# Altium PCB bdcmc-24-2-motors.PcbDoc
Units mil, origin at the board's own origin, x right, y up, seen from the top; angles counter-clockwise.
Board outline 6000 x 4000 mil, 2 copper layers (Top Layer, Bottom Layer); 195 components, 101 nets, 659 pads, 24 vias.
Unrouted connection lines stored in the file: 468.
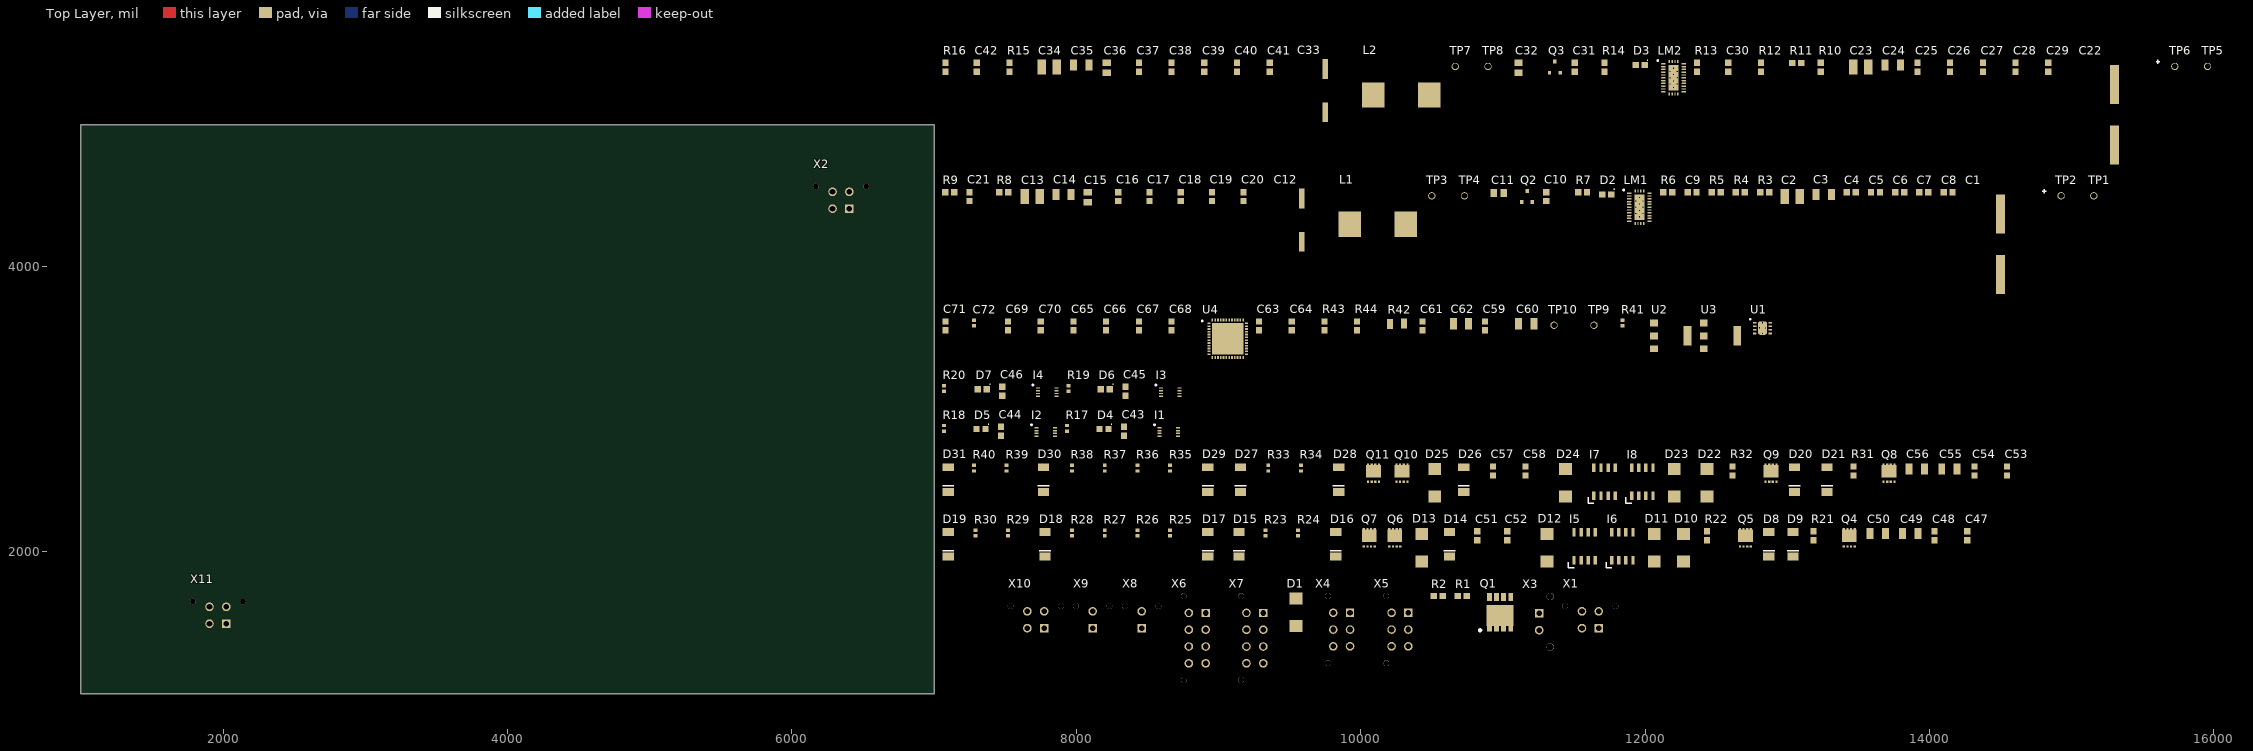
[diagram p0: Top Layer view]
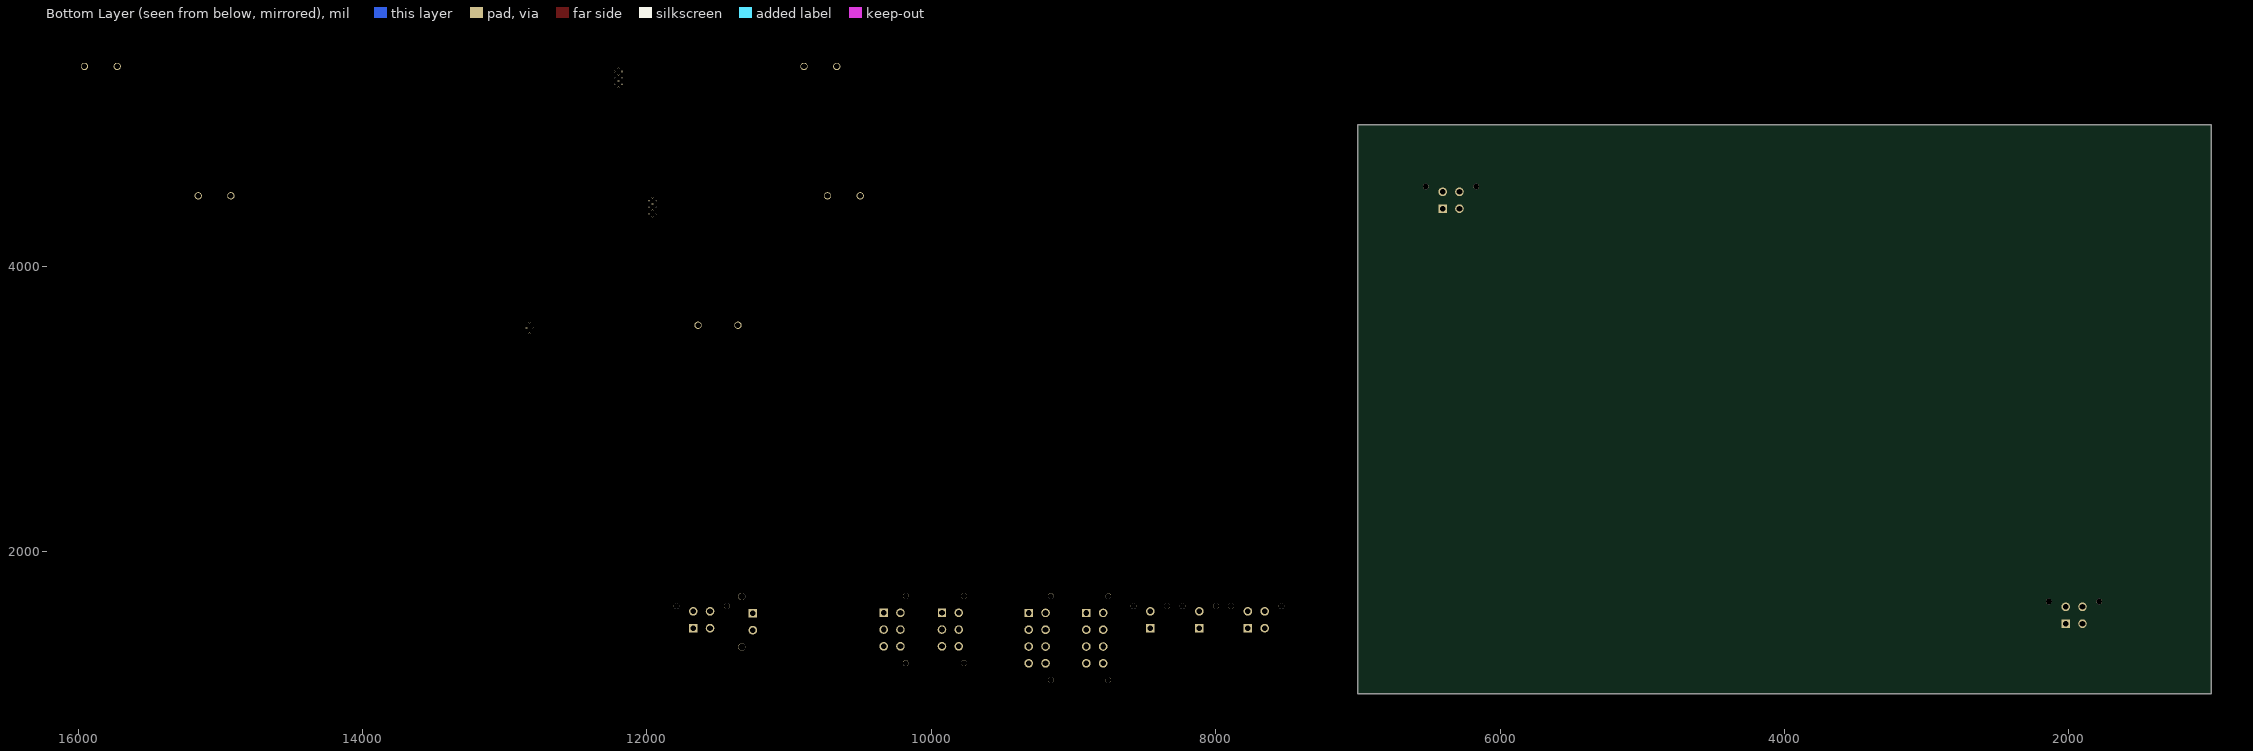
[diagram p1: Bottom Layer view, seen from below]

## Layer stack, top to bottom
Top Solder: solder mask 0.4, Solder Resist, Dk 3.5
Top Layer: signal copper 1.4
Dielectric 1: dielectric 12.6, FR-4, Dk 4.8
Bottom Layer: signal copper 1.4
Bottom Solder: solder mask 0.4, Solder Resist, Dk 3.5

## Board outline
1000,1000 7000,1000 7000,5000 1000,5000

## Design rules (kind name [scope] priority, off if disabled: settings)
Clearance [All] p1: gap=10 ignorepadtopadclearanceinfootprint=FALSE except(0: Arc-Hole Track-Hole SMDPad-Hole THPad-Hole Via-Hole Fill-Hole Poly-Hole Region-Hole Text-Hole)
DiffPairsRouting [All] p1: maxlimit=10 minlimit=10 mostfreqgap=10 toplayer_minwidth=15 toplayer_maxwidth=15 toplayer_prefwidth=15 bottomlayer_minwidth=15 bottomlayer_maxwidth=15 bottomlayer_prefwidth=15 maxuncoupledlength=500
PolygonConnect [All] p1: connectstyle=Relief reliefconductorwidth=10 reliefentries=4 polygonreliefangle="90 Angle" airgapwidth=10
RoomDefinition Motor_12V_Buck_1 [InComponentClass('Motor_12V_Buck_1')] p1: confinementstyle=ConfineIn formatcopy=TRUE lockcomponents=FALSE outline 7045,4710 16095,4710 16095,5570 7045,5570
RoomDefinition Motor_12V_Buck_0 [InComponentClass('Motor_12V_Buck_0')] p2: confinementstyle=ConfineIn formatcopy=TRUE lockcomponents=FALSE outline 7045,3800 15275,3800 15275,4660 7045,4660
RoomDefinition MCU_CAN [InComponentClass('MCU_CAN')] p3: confinementstyle=ConfineIn formatcopy=TRUE lockcomponents=FALSE outline 7045,3340 12900,3340 12900,3750 7045,3750
RoomDefinition HBridge_Top_Level_1 [InComponentClass('HBridge_Top_Level_1')] p4: confinementstyle=ConfineIn formatcopy=TRUE lockcomponents=FALSE outline 7045,3060 8750,3060 8750,3290 7045,3290
RoomDefinition HBridge_Top_Level_0 [InComponentClass('HBridge_Top_Level_0')] p5: confinementstyle=ConfineIn formatcopy=TRUE lockcomponents=FALSE outline 7045,2780 8740,2780 8740,3010 7045,3010
RoomDefinition HBridge_Design_1 [InComponentClass('HBridge_Design_1')] p6: confinementstyle=ConfineIn formatcopy=TRUE lockcomponents=FALSE outline 7045,2330 14705,2330 14705,2730 7045,2730
RoomDefinition HBridge_Design_0 [InComponentClass('HBridge_Design_0')] p7: confinementstyle=ConfineIn formatcopy=TRUE lockcomponents=FALSE outline 7045,1875 14425,1875 14425,2275 7045,2275
RoutingVias [All] p1: holewidth=28 width=50 viastyle="Through Hole" minholewidth=28 minwidth=50 maxholewidth=28 maxwidth=50
SolderMaskExpansion [All] p1: expansion=4 istentingtop=FALSE
Width [All] p1: maxlimit=10 minlimit=10 preferedwidth=10
29 further rules are at their usual default settings.

## Classes and differential pairs
component class Motor_12V_Buck_1: C22 C23 C24 C25 C26 C27 C28 C29 C30 C31 C32 C33 C34 C35 C36 C37 C38 C39 C40 C41 C42 D3 L2 LM2 Q3 R10 R11 R12 R13 R14 R15 R16 TP5 TP6 TP7 TP8
component class Motor_12V_Buck_0: C1 C2 C3 C4 C5 C6 C7 C8 C9 C10 C11 C12 C13 C14 C15 C16 C17 C18 C19 C20 C21 D2 L1 LM1 Q2 R3 R4 R5 R6 R7 R8 R9 TP1 TP2 TP3 TP4
component class MCU_CAN: C59 C60 C61 C62 C63 C64 C65 C66 C67 C68 C69 C70 C71 C72 P1 R41 R42 R43 R44 TP9 TP10 U1 U2 U3 U4
component class HBridge_Top_Level_1: C45 C46 D6 D7 I3 I4 R19 R20
component class HBridge_Top_Level_0: C43 C44 D4 D5 I1 I2 R17 R18
component class HBridge_Design_1: C53 C54 C55 C56 C57 C58 D20 D21 D22 D23 D24 D25 D26 D27 D28 D29 D30 D31 I7 I8 Q8 Q9 Q10 Q11 R31 R32 R33 R34 R35 R36 R37 R38 R39 R40
component class HBridge_Design_0: C47 C48 C49 C50 C51 C52 D8 D9 D10 D11 D12 D13 D14 D15 D16 D17 D18 D19 I5 I6 Q4 Q5 Q6 Q7 R21 R22 R23 R24 R25 R26 R27 R28 R29 R30
component class Connectors: D1 Q1 R1 R2 X1 X2 X3 X4 X5 X6 X7 X8 X9 X10 X11
differential pair CAN: +CAN_P -CAN_N

## Components (designator, comment, footprint, x,y, rotation, side; value= is the part's Value field where it differs from the comment)
C1 "100SEV100M12.5X16" ELEC-100U-0001 14500,4160 r0 top
C2 "C3225X7R1N106K250AC" CAP-1210 13035,4495 r0 top
C3 "CL31B105KCHNNNE" "CAP-1206 - duplicate" 13250,4510 r0 top
C4 "CC0603KRX7R0BB104" CAP-0603 13450,4525 r0 top
C5 "C1608C0G2A103J080AC" CAP-0603 13620,4525 r0 top
C6 "C0603Y102K1RAC7867" CAP-0603 13790,4525 r0 top
C7 "0603N101J101CT" CAP-0603 13960,4525 r0 top
C8 "0603N100J500CT" CAP-0603 14130,4525 r0 top
C9 "CC0603KRX7R9BB333" CAP-0603 12330,4525 r0 top
C10 "UMK107BBJ225KA-T" CAP-0603 11305,4495 r90 top
C11 "KAM21KR72A474KL" CAP-0805 10970,4520 r0 top
C12 "50TZV220M10X10.5" ELEC-220U-0003 9585,4330 r0 top
C13 "C3225X7R1N106K250AC" CAP-1210 7690,4495 r0 top
C14 "CL31B105KCHNNNE" "CAP-1206 - duplicate" 7905,4510 r0 top
C15 "KAM21KR72A474KL" CAP-0805 8080,4490 r90 top
C16 "CC0603KRX7R0BB104" CAP-0603 8295,4495 r90 top
C17 "C1608C0G2A103J080AC" CAP-0603 8515,4495 r90 top
C18 "C0603Y102K1RAC7867" CAP-0603 8735,4495 r90 top
C19 "0603N101J101CT" CAP-0603 8955,4495 r90 top
C20 "0603N100J500CT" CAP-0603 9175,4495 r90 top
C21 "885012006087" CAP-0603 7250,4495 r90 top
C22 "100SEV100M12.5X16" ELEC-100U-0001 15300,5070 r0 top
C23 "C3225X7R1N106K250AC" CAP-1210 13515,5405 r0 top
C24 "CL31B105KCHNNNE" "CAP-1206 - duplicate" 13735,5420 r0 top
C25 "CC0603KRX7R0BB104" CAP-0603 13915,5405 r90 top
C26 "C1608C0G2A103J080AC" CAP-0603 14145,5405 r90 top
C27 "C0603Y102K1RAC7867" CAP-0603 14375,5405 r90 top
C28 "0603N101J101CT" CAP-0603 14605,5405 r90 top
C29 "0603N100J500CT" CAP-0603 14835,5405 r90 top
C30 "CC0603KRX7R9BB333" CAP-0603 12585,5405 r90 top
C31 "UMK107BBJ225KA-T" CAP-0603 11505,5405 r90 top
C32 "KAM21KR72A474KL" CAP-0805 11110,5400 r90 top
C33 "50TZV220M10X10.5" ELEC-220U-0003 9750,5240 r0 top
C34 "C3225X7R1N106K250AC" CAP-1210 7810,5405 r0 top
C35 "CL31B105KCHNNNE" "CAP-1206 - duplicate" 8030,5420 r0 top
C36 "KAM21KR72A474KL" CAP-0805 8215,5400 r90 top
C37 "CC0603KRX7R0BB104" CAP-0603 8440,5405 r90 top
C38 "C1608C0G2A103J080AC" CAP-0603 8670,5405 r90 top
C39 "C0603Y102K1RAC7867" CAP-0603 8900,5405 r90 top
C40 "0603N101J101CT" CAP-0603 9130,5405 r90 top
C41 "0603N100J500CT" CAP-0603 9360,5405 r90 top
C42 "885012006087" CAP-0603 7300,5405 r90 top
C43 "CC0603KRX7R0BB104" CAP-0603 8335,2845 r90 top
C44 "CC0603KRX7R0BB104" CAP-0603 7470,2845 r90 top
C45 "CC0603KRX7R0BB104" CAP-0603 8345,3125 r90 top
C46 "CC0603KRX7R0BB104" CAP-0603 7480,3125 r90 top
C47 "C1608C0G2A103J080AC" CAP-0603 14265,2110 r90 top
C48 "C1608C0G2A103J080AC" CAP-0603 14035,2110 r90 top
C49 "CAP-1U-0001" "CAP-1206 - duplicate" 13860,2125 r0 top
C50 "CAP-1U-0001" "CAP-1206 - duplicate" 13630,2125 r0 top
C51 "CC0603KRX7R0BB104" CAP-0603 10820,2110 r90 top
C52 "CC0603KRX7R0BB104" CAP-0603 11030,2110 r90 top
C53 "C1608C0G2A103J080AC" CAP-0603 14545,2565 r90 top
C54 "C1608C0G2A103J080AC" CAP-0603 14315,2565 r90 top
C55 "CAP-1U-0001" "CAP-1206 - duplicate" 14135,2580 r0 top
C56 "CAP-1U-0001" "CAP-1206 - duplicate" 13905,2580 r0 top
C57 "CC0603KRX7R0BB104" CAP-0603 10930,2565 r90 top
C58 "CC0603KRX7R0BB104" CAP-0603 11160,2565 r90 top
C59 "CGA3E3X7R1H334K080AB" CAP-0603 10875,3585 r90 top
C60 "CL31B106KBHNNNE" CAP-1206 11165,3600 r0 top
C61 "CGA3E3X7R1H334K080AB" CAP-0603 10435,3585 r90 top
C62 "CL31B106KBHNNNE" CAP-1206 10705,3600 r0 top
C63 "TMK107BBJ475KA-T" CAP-0603 9285,3585 r90 top
C64 "CC0603KRX7R0BB104" CAP-0603 9515,3585 r90 top
C65 "TMK107BBJ475KA-T" CAP-0603 7980,3585 r90 top
C66 "CC0603KRX7R0BB104" CAP-0603 8210,3585 r90 top
C67 "CC0603KRX7R0BB104" CAP-0603 8440,3585 r90 top
C68 "CC0603KRX7R0BB104" CAP-0603 8670,3585 r90 top
C69 "UMK107AB7105KA-T" CAP-0603 7520,3585 r90 top
C70 "CC0603KRX7R0BB104" CAP-0603 7750,3585 r90 top
C71 "UMK107AB7105KA-T" CAP-0603 7080,3585 r90 top
C72 "CC0402KRX7R0BB103" CAP-0402 7280,3605 r90 top
D1 "SMBJE43CAH" "DO-214AA (SMBJ)" 9545,1570 r90 top
D2 "150060AS75000" LED-0603 11730,4510 r0 top
D3 "150060AS75000" LED-0603 11965,5420 r0 top
D4 "150060AS75000" LED-0603 8195,2860 r0 top
D5 "150060AS75000" LED-0603 7330,2860 r0 top
D6 "150060AS75000" LED-0603 8205,3140 r0 top
D7 "150060AS75000" LED-0603 7340,3140 r0 top
D8 "PMEG6030EP,115" DIO-SOD128 12870,2050 r0 top
D9 "PMEG6030EP,115" DIO-SOD128 13040,2050 r0 top
D10 "SMBJ12CA" "DO-214AA (SMBJ)" 12270,2025 r90 top
D11 "SMBJ12CA" "DO-214AA (SMBJ)" 12065,2025 r90 top
D12 "SMBJ12CA" "DO-214AA (SMBJ)" 11310,2025 r90 top
D13 "SMBJ12CA" "DO-214AA (SMBJ)" 10430,2025 r90 top
D14 "PMEG6030EP,115" DIO-SOD128 10625,2050 r0 top
D15 "PMEG6030EP,115" DIO-SOD128 9145,2050 r0 top
D16 "PMEG6030EP,115" DIO-SOD128 9825,2050 r0 top
D17 "PMEG6030EP,115" DIO-SOD128 8925,2050 r0 top
D18 "PMEG6030EP,115" DIO-SOD128 7780,2050 r0 top
D19 "PMEG6030EP,115" DIO-SOD128 7100,2050 r0 top
D20 "PMEG6030EP,115" DIO-SOD128 13050,2505 r0 top
D21 "PMEG6030EP,115" DIO-SOD128 13280,2505 r0 top
D22 "SMBJ12CA" "DO-214AA (SMBJ)" 12435,2480 r90 top
D23 "SMBJ12CA" "DO-214AA (SMBJ)" 12205,2480 r90 top
D24 "SMBJ12CA" "DO-214AA (SMBJ)" 11440,2480 r90 top
D25 "SMBJ12CA" "DO-214AA (SMBJ)" 10520,2480 r90 top
D26 "PMEG6030EP,115" DIO-SOD128 10725,2505 r0 top
D27 "PMEG6030EP,115" DIO-SOD128 9155,2505 r0 top
D28 "PMEG6030EP,115" DIO-SOD128 9845,2505 r0 top
D29 "PMEG6030EP,115" DIO-SOD128 8925,2505 r0 top
D30 "PMEG6030EP,115" DIO-SOD128 7770,2505 r0 top
D31 "PMEG6030EP,115" DIO-SOD128 7100,2505 r0 top
I1 "SN74LVC2G157DCUR" IC-MUX-8VSSOP 8585,2810 r0 top
I2 "SN74LVC2G157DCUR" IC-MUX-8VSSOP 7720,2810 r0 top
I3 "SN74LVC2G157DCUR" IC-MUX-8VSSOP 8595,3090 r0 top
I4 "SN74LVC2G157DCUR" IC-MUX-8VSSOP 7730,3090 r0 top
I5 "UCC27284QDQ1" IC-BUCK-8SOIC 11575,2035 r0 top
I6 "UCC27284QDQ1" IC-BUCK-8SOIC 11840,2035 r0 top
I7 "UCC27284QDQ1" IC-BUCK-8SOIC 11715,2490 r0 top
I8 "UCC27284QDQ1" IC-BUCK-8SOIC 11980,2490 r0 top
L1 "SRP1270-100M" PWRIND-10U-0002 10120,4300 r0 top
L2 "SRP1270-100M" PWRIND-10U-0002 10285,5210 r0 top
LM1 "LM76005RNPR" IC-30-WQFN(6x4) 11960,4420 r0 top
LM2 "LM76005RNPR" IC-30-WQFN(6x4) 12200,5330 r0 top
Q1 "TPH7R006PL,L1Q" NMOS-8PowerVDFN 10905,1460 r0 top
Q2 "T2N7002AK,LM" NMOS-SOT23-3 11170,4495 r0 top
Q3 "T2N7002AK,LM" NMOS-SOT23-3 11365,5405 r0 top
Q4 "TPN11006PL,LQ" NMOS-8TSON 13435,2095 r0 top
Q5 "TPN11006PL,LQ" NMOS-8TSON 12705,2095 r0 top
Q6 "TPN11006PL,LQ" NMOS-8TSON 10240,2095 r0 top
Q7 "TPN11006PL,LQ" NMOS-8TSON 10060,2095 r0 top
Q8 "TPN11006PL,LQ" NMOS-8TSON 13715,2550 r0 top
Q9 "TPN11006PL,LQ" NMOS-8TSON 12885,2550 r0 top
Q10 "TPN11006PL,LQ" NMOS-8TSON 10290,2550 r0 top
Q11 "TPN11006PL,LQ" NMOS-8TSON 10090,2550 r0 top
R1 "ERJ-3EKF2003V" RES-0603 10715,1685 r0 top
R2 "RC0603FR-07100KL" RES-0603 10545,1685 r0 top
R3 "RC0603FR-072M15L" RES-0603 12840,4525 r0 top
R4 "RC0603FR-07100KL" RES-0603 12670,4525 r0 top
R5 "RC0603FR-0776K8L" RES-0603 12500,4525 r0 top
R6 "AC0603FR-10100RL" RES-0603 12160,4525 r0 top
R7 "RC0603FR-0710KP" RES-0603 11560,4525 r0 top
R8 "RC0603FR-07100KL" RES-0603 7490,4525 r0 top
R9 "RC0603FR-079K09L" RES-0603 7110,4525 r0 top
R10 "RC0603FR-072M15L" RES-0603 13235,5405 r90 top
R11 "RC0603FR-07100KL" RES-0603 13065,5435 r0 top
R12 "RC0603FR-0776K8L" RES-0603 12815,5405 r90 top
R13 "AC0603FR-10100RL" RES-0603 12365,5405 r90 top
R14 "RC0603FR-0710KP" RES-0603 11715,5405 r90 top
R15 "RC0603FR-07100KL" RES-0603 7530,5405 r90 top
R16 "RC0603FR-079K09L" RES-0603 7080,5405 r90 top
R17 "RC0402JR-07100RP" RES-0402 7935,2865 r90 top
R18 "RC0402JR-07100RP" RES-0402 7070,2865 r90 top
R19 "RC0402JR-07100RP" RES-0402 7945,3145 r90 top
R20 "RC0402JR-07100RP" RES-0402 7070,3145 r90 top
R21 "RNCP0603FTD1R00" RES-0603 13185,2110 r90 top
R22 "RNCP0603FTD1R00" RES-0603 12435,2110 r90 top
R23 "RC0402JR-0733RP" RES-0402 9330,2130 r90 top
R24 "RC0402JR-0733RP" RES-0402 9560,2130 r90 top
R25 "RC0402JR-0733RP" RES-0402 8660,2130 r90 top
R26 "RC0402JR-0733RP" RES-0402 8430,2130 r90 top
R27 "RC0402JR-0733RP" RES-0402 8200,2130 r90 top
R28 "RC0402JR-0733RP" RES-0402 7970,2130 r90 top
R29 "RC0402JR-0733RP" RES-0402 7520,2130 r90 top
R30 "RC0402JR-0733RP" RES-0402 7290,2130 r90 top
R31 "RNCP0603FTD1R00" RES-0603 13465,2565 r90 top
R32 "RNCP0603FTD1R00" RES-0603 12615,2565 r90 top
R33 "RC0402JR-0733RP" RES-0402 9350,2585 r90 top
R34 "RC0402JR-0733RP" RES-0402 9580,2585 r90 top
R35 "RC0402JR-0733RP" RES-0402 8660,2585 r90 top
R36 "RC0402JR-0733RP" RES-0402 8430,2585 r90 top
R37 "RC0402JR-0733RP" RES-0402 8200,2585 r90 top
R38 "RC0402JR-0733RP" RES-0402 7970,2585 r90 top
R39 "RC0402JR-0733RP" RES-0402 7510,2585 r90 top
R40 "RC0402JR-0733RP" RES-0402 7280,2585 r90 top
R41 "RC0402FR-074K7P" RES-0402 11840,3605 r90 top
R42 "CRGH1206F120R" RES-1206 10255,3600 r0 top
R43 "AF0603FR-074K7L" RES-0603 9745,3585 r90 top
R44 "AF0603FR-074K7L" RES-0603 9975,3585 r90 top
TP1 "5003" TEST-POINT-0001 15155,4500 r0 top
TP2 "5003" TEST-POINT-0001 14925,4500 r0 top
TP3 "5003" TEST-POINT-0001 10500,4500 r0 top
TP4 "5003" TEST-POINT-0001 10730,4500 r0 top
TP5 "5003" TEST-POINT-0001 15955,5410 r0 top
TP6 "5003" TEST-POINT-0001 15725,5410 r0 top
TP7 "5003" TEST-POINT-0001 10665,5410 r0 top
TP8 "5003" TEST-POINT-0001 10895,5410 r0 top
TP9 "5003" TEST-POINT-0001 11640,3590 r0 top
TP10 "5003" TEST-POINT-0001 11360,3590 r90 top
U1 "TCAN1042HGDRBTQ1" IC-8-VSON 12825,3570 r0 top
U2 "UA78M33CDCYR" IC-SOT-223-4 12180,3515 r0 top
U3 "UA78M05IDCYR" IC-SOT-223-4 12530,3515 r0 top
U4 "STM32G431CBU6" MCU-UFQFPN48 9065,3495 r0 top
X1 "Molex 43045-0412" 43045-0412 11615,1460 r0 top
X2 "Molex 43045-0412" 43045-0412 6345,4410 r0 top
X3 "Molex 43650-0215" 43650-0215 11255,1505 r90 top
X4 "Molex 43045-0612" 43045-0612 9925,1450 r90 top
X5 "Molex 43045-0612" 43045-0612 10335,1450 r90 top
X6 "Molex 43045-0812" 43045-0812 8910,1390 r90 top
X7 "Molex 43045-0812" 43045-0812 9315,1390 r90 top
X8 "Molex - Micro-Fit 3.0 Series connector,  3.00mm (0.118\") pitch header, 2 positions." 43045-0212 8460,1460 r0 top
X9 "Molex - Micro-Fit 3.0 Series connector,  3.00mm (0.118\") pitch header, 2 positions." 43045-0212 8115,1460 r0 top
X10 "Molex 43045-0412" 43045-0412 7715,1460 r0 top
X11 "Molex 43045-0412" 43045-0412 1964.06,1491.89 r0 top

## Footprints (in the part's own frame and the unit in brackets; to place one, negate y for a bottom-side part, rotate by r counter-clockwise, add the part's x,y. Pads: shape width x height; smd on the part's side, far side on the other; paste and mask are expansions set on the pad)
43045-0212 [mm]
  round 1.02 hole 1.02 unplated: 1(-3,3.94) 1(3,3.94)
  rect 1.482x1.482 / inner rect 1.524x1.524 / far side rect 1.482x1.482 hole 1.02: P$1(0,0)
  round 1.53 / inner round 1.524 / far side round 1.53 hole 1.02: P$2(0,3)
43045-0412 [mm]
  round 1.02 hole 1.02 unplated: 1(-4.5,3.94) 1(4.5,3.94)
  rect 1.482x1.482 / inner rect 1.524x1.524 / far side rect 1.482x1.482 hole 1.02: P$1(1.5,0)
  round 1.53 / inner round 1.524 / far side round 1.53 hole 1.02: P$2(-1.5,0) P$3(1.5,3) P$4(-1.5,3)
  body extent -5.07,-2.45 5.08,6.32, height 10.03
43045-0612 [mm]
  round 1.02 hole 1.02 unplated: 1(-6,3.94) 1(6,3.94)
  rect 1.482x1.482 / inner rect 1.524x1.524 / far side rect 1.482x1.482 hole 1.02: P$1(3,0)
  round 1.53 / inner round 1.524 / far side round 1.53 hole 1.02: P$2(0,0) P$3(-3,0) P$4(3,3) P$5(0,3) P$6(-3,3)
  body extent -6.57,-2.45 6.58,6.32, height 10.03
43045-0812 [mm]
  round 1.02 hole 1.02 unplated: 1(-7.5,3.94) 1(7.5,3.94)
  rect 1.482x1.482 / inner rect 1.524x1.524 / far side rect 1.482x1.482 hole 1.02: P$1(4.5,0)
  round 1.53 / inner round 1.524 / far side round 1.53 hole 1.02: P$2(1.5,0) P$3(-1.5,0) P$4(-4.5,0) P$5(4.5,3) P$6(1.5,3) P$7(-1.5,3) P$8(-4.5,3)
  body extent -8.07,-2.45 8.08,6.32, height 10.03
43650-0215 [mil]
  round 50 hole 50 unplated: 1(-177.17,-77.17) 1(177.17,-77.17)
  rect 58.33x58.33 / inner rect 60x60 / far side rect 58.33x58.33 hole 40.16: P$1(59.06,0)
  round 60.24 / inner round 60 / far side round 60.24 hole 40.16: P$2(-59.06,0)
  body extent -190,-97 190,123, height 395
CAP-0402 [mm]
  rect 0.6x0.7 smd: 1(-0.5,0) 2(0.5,0)
  body extent -0.5,-0.22 0.5,0.23, height 0.5
CAP-0603 [mm]
  rect 1.15x1.1 smd: 1(-0.8,0) 2(0.8,0)
  body extent -0.8,-0.45 0.8,0.45, height 0.8
CAP-0805 [mm]
  rect 1.16x1.47 smd: 1(-0.88,0) 2(0.88,0)
  body extent -1,-0.63 1,0.63, height 0.94
CAP-1206 [mm]
  rect 1.25x2 smd: 1(-1.375,0) 2(1.375,0)
  body extent -1.6,-0.8 1.6,0.8, height 1.5
"CAP-1206 - duplicate" [mm]
  rect 1.25x2 smd: 1(-1.248,0) 2(1.502,0)
  body extent -1.47,-0.8 1.73,0.8, height 1.5
CAP-1210 [mm]
  rect 1.53x2.72 smd: 1(-1.341,0) 2(1.341,0)
  body extent -1.6,-1.25 1.6,1.25, height 2.7
DIO-SOD128 [mm]
  rect 2x1.4 smd: 1(0,2.2) 2(0,-2.2)
  silkscreen extent -1.02,-1.14 1.02,-1.14, body extent -1.25,-2.35 1.25,2.35, height 1.05
"DO-214AA (SMBJ)" [mm]
  rect 2.16x2.26 smd: 1(-2.416,0) 2(2.484,0)
  body extent -2.72,-1.95 2.78,1.95, height 2.45
ELEC-100U-0001 [mm]
  rect 1.6x7 smd: 1(0,5.4) 2(0,-5.4)
  silkscreen extent 7.45,9.08 8.13,9.82, body extent -6.6,-7.15 6.6,7.15, height 16.56
ELEC-220U-0003 [mm]
  rect 1x3.5 smd: 1(0,-3.85) 2(0,3.85)
  body extent -5.25,-5.45 5.25,5.45, height 10.54
IC-8-VSON [mm]
  rrect50% 0.6x0.3 smd mask+0.07: 1(-1.4,0.975) 2(-1.4,0.325) 3(-1.4,-0.325) 4(-1.4,-0.975) 5(1.4,-0.975) 6(1.4,-0.325) 7(1.4,0.325) 8(1.4,0.975)
  rrect50% 1.6x2.4 smd: 9(0,0)
  silkscreen extent -2.26,1.48 -2.08,1.67, body extent -1.5,-1.5 1.5,1.5, height 1
IC-30-WQFN(6x4) [mm] "30 pin WQFN with exposed pad"
  rrect50% 0.75x0.25 smd mask+0.07: 1(-1.825,2.5) 2(-1.825,2) 3(-1.825,1.5) 4(-1.825,1) 5(-1.825,0.5) 6(-1.825,0) 7(-1.825,-0.5) 8(-1.825,-1) 9(-1.825,-1.5) 10(-1.825,-2) 11(-1.825,-2.5) 16(1.825,-2.5) 17(1.825,-2) 18(1.825,-1.5) 19(1.825,-1) 20(1.825,-0.5) 21(1.825,0) 22(1.825,0.5) 23(1.825,1) 24(1.825,1.5) 25(1.825,2) 26(1.825,2.5)
  rrect50% 0.25x0.6 smd mask+0.07: 12(-0.75,-2.9) 13(-0.25,-2.9) 14(0.25,-2.9) 15(0.75,-2.9) 27(0.75,2.9) 28(0.25,2.9) 29(-0.25,2.9) 30(-0.75,2.9)
  rect 1.8x4.5 smd: 31(0,0)
  silkscreen extent -2.94,2.96 -2.71,3.19, body extent -2,-3 2,3, height 0.8
IC-BUCK-8SOIC [mm]
  rect 0.6x1.5 smd: 1(-1.905,-2.5) 2(-0.635,-2.5) 3(0.635,-2.5) 4(1.905,-2.5) 5(1.905,2.5) 6(0.635,2.5) 7(-0.635,2.5) 8(-1.905,2.5)
  silkscreen extent -2.92,-3.81 -1.91,-2.79, body extent -2.45,-3 2.45,3, height 1.75
IC-MUX-8VSSOP [mm]
  rect 0.75x0.25 smd: 1(0,1.5) 2(0,1) 3(0,0.5) 4(0,0) 5(3.3,0) 6(3.3,0.5) 7(3.3,1) 8(3.3,1.5)
  silkscreen extent -1.02,1.91 -0.76,2.16, body extent 0.1,-0.24 3.2,1.76, height 0.9
IC-SOT-223-4 [mm]
  rect 1.4x1.2 smd mask+0.07: 1(-3,2.3) 2(-3,0) 3(-3,-2.3)
  rect 1.4x3.5 smd: 2(3,0)
  body extent -3.5,-3.25 3.5,3.25, height 1.68
LED-0603 [mm]
  rect 1.15x1.1 smd: 1(-0.8,0) 2(0.8,0)
  silkscreen extent 1.27,0.89 1.4,0.89, body extent -0.8,-0.3 0.8,0.3, height 1
MCU-UFQFPN48 [mm] "STM32G431CBU6"
  rect 0.55x0.3 smd mask+0.07: 1(-3.375,2.75) 2(-3.375,2.25) 3(-3.375,1.75) 4(-3.375,1.25) 5(-3.375,0.75) 6(-3.375,0.25) 7(-3.375,-0.25) 8(-3.375,-0.75) 9(-3.375,-1.25) 10(-3.375,-1.75) 11(-3.375,-2.25) 12(-3.375,-2.75) 25(3.375,-2.75) 26(3.375,-2.25) 27(3.375,-1.75) 28(3.375,-1.25) 29(3.375,-0.75) 30(3.375,-0.25) 31(3.375,0.25) 32(3.375,0.75) 33(3.375,1.25) 34(3.375,1.75) 35(3.375,2.25) 36(3.375,2.75)
  rect 0.3x0.55 smd mask+0.07: 13(-2.75,-3.375) 14(-2.25,-3.375) 15(-1.75,-3.375) 16(-1.25,-3.375) 17(-0.75,-3.375) 18(-0.25,-3.375) 19(0.25,-3.375) 20(0.75,-3.375) 21(1.25,-3.375) 22(1.75,-3.375) 23(2.25,-3.375) 24(2.75,-3.375) 37(2.75,3.375) 38(2.25,3.375) 39(1.75,3.375) 40(1.25,3.375) 41(0.75,3.375) 42(0.25,3.375) 43(-0.25,3.375) 44(-0.75,3.375) 45(-1.25,3.375) 46(-1.75,3.375) 47(-2.25,3.375) 48(-2.75,3.375)
  rect 5.6x5.6 smd: 49(0,0)
  silkscreen extent -4.67,3.08 -4.43,3.32, body extent -3.56,-3.56 3.56,3.56, height 0.61
NMOS-8PowerVDFN [mm]
  rect 0.85x1.45 smd: 1(0,5.588) 2(1.27,5.588) 2(2.54,5.588) 2(3.81,5.588)
  rect 0.85x1.05 smd: 3(0,-0.112) 3(1.27,-0.112) 3(2.54,-0.112) 3(3.81,-0.112)
  rect 4.8x3.75 smd: 3(1.905,2.286)
  silkscreen extent -1.91,-0.64 -1.4,-0.13
NMOS-8TSON [mm]
  rect 0.4x0.4 smd: 1(0.975,-1.55) 2(-0.975,-1.55) 2(-0.325,-1.55) 2(0.325,-1.55)
  rect 0.4x0.3 smd: 3(-0.975,1.6) 3(-0.325,1.6) 3(0.325,1.6) 3(0.975,1.6)
  rect 2.65x2.2 smd: 3(0,0.35)
  body extent -1.65,-1.65 1.65,1.65, height 0.85
NMOS-SOT23-3 [mm]
  rect 0.6x0.7 smd: 1(-0.95,-1) 2(0.95,-1) 3(0,1)
  body extent -1.46,-1.18 1.46,1.19, height 1.12
PWRIND-10U-0002 [mm]
  rect 4x4.5 smd: 1(-5,0) 2(5,0)
  body extent -6.85,-6.45 6.85,6.45, height 7.06
RES-0402 [mm]
  rect 0.6x0.7 smd: 1(-0.5,0) 2(0.5,0)
  body extent -0.5,-0.25 0.5,0.25, height 0.3
RES-0603 [mm]
  rect 1.15x1.1 smd: 1(-0.8,0) 2(0.8,0)
  body extent -0.8,-0.4 0.8,0.4, height 0.43
RES-1206 [mm]
  rect 1.05x1.8 smd: 1(-1.275,0) 2(1.275,0.043)
  body extent -1.6,-0.77 1.6,0.82, height 0.55
TEST-POINT-0001 [mm] "2024 miniature test point"
  round 1.3 hole 1: 1(0,0)
  body extent -1.27,-1.27 1.27,1.27, height 4.57

## Part data
C1 C22: library part ELEC-100U-0001, "100 µF 100 V Aluminum Electrolytic Capacitors Radial, Can - SMD 2000 Hrs @ 85°C", Capacitance="100 uF", Manufacturer=Rubycon, Tolerance="+/- 20%", Voltage="100 V", Assembled?=No, ESR="idk check the datasheet i couldnt find it"
C2 C13 C23 C34: library part CAP-10U-0004, "10 µF ±10% 75V Ceramic Capacitor X7R 1210 (3225 Metric)", Capacitance="10 uF +/- 10%", Voltage Rating=75V
C3 C14 C24 C35: library part CAP-1U-0001, "1 µF ±10% 100V Ceramic Capacitor X7R 1206 (3216 Metric)", Capacitance="1 uF +/- 10%", Voltage=100V
C4 C16 C25 C37 C43 C44 C45 C46 C51 C52 C57 C58 C64 C66 C67 C68 C70: library part CAP-100N-0001, "CAP CER 0.1UF 100V X7R 0603", Capacitance="100nF +/-10%", Manufacturer=YAGEO, Package Size=0603, Temperature Coefficient=X7R, Voltage Rating=100V, Assembled?=no, Manufacturer Part Number=CC0603KRX7R0BB104
C5 C17 C26 C38 C47 C48 C53 C54: library part CAP-10N-0002, "CAP CER 10000PF 100V C0G 0603", Capacitance="10nF +/-5%", Manufacturer="TDK Corporation", Package Size=0603, Temperature Coefficient=C0G/NP0, Voltage Rating=100V, Assembled?=no, Manufacturer Part Number=C1608C0G2A103J080AC
C6 C18 C27 C39: library part CAP-1N-0001, "1000 pF ±10% 100V Ceramic Capacitor X7R 0603 (1608 Metric)", Capacitance="1 nF +/-10%", Voltage=100V
C7 C19 C28 C40: library part CAP-100P-0002, "100 pF ±5% 100V Ceramic Capacitor C0G, NP0 0603 (1608 Metric)", Capacitance="100 pF", Package Size=0603, Temp Coeff=C0G/NP0, Tolerance=+/-5%, Voltage=100V
C8 C20 C29 C41: library part CAP-10P-0001, "10 pF ±5% 50V Ceramic Capacitor C0G, NP0 0603 (1608 Metric)", Capacitance="10 pF +/- 5%", Manufacturer="Walshin Technology Corporation", Package Size=0603, Temperature Coefficient="C0G, NP0", Voltage Rating=50V, Assembled?=Yes, Manufacturer Part Number=0603N100J500CT
C9 C30: library part CAP-33N-0001, "0.033 µF ±10% 50V Ceramic Capacitor X7R 0603 (1608 Metric)", Capacitance="33nF +/-10%", Manufacturer=YAGEO, Package Size=0603, Temperature Coefficient=X7R, Voltage Rating=50V, Assembled?=no, Manufacturer Part Number=CC0603KRX7R9BB333
C10 C31: library part CAP-2.2U-0001, "2.2 µF ±10% 50V Ceramic Capacitor X5R 0603 (1608 Metric)", Capacitance="2.2 uF", oltage=50V
C11 C15 C32 C36: library part CAP-0.47U-0001, "0.47 µF ±10% 100V Ceramic Capacitor X7R 0805 (2012 Metric)", Capacitance="0.47 uF", Package Size=0805, Temperature Coefficient=X7R, Tolerance="+/- 10%", Voltage=100V, Assembled?=No
C12 C33: library part ELEC-220U-0003, "220 µF 50 V Aluminum Electrolytic Capacitors Radial, Can - SMD 2000 Hrs @ 105°C", Capacitance="220 uF +/- 20%", Voltage Rating=50V, Size=.406inx.406in*.413in
C21 C42: library part CAP-1P-0001, "1 pF ±0.25pF 100V Ceramic Capacitor C0G, NP0 0603 (1608 Metric)", Capacitance="1 pF", Package Size=0603, Temperature Coefficient=C0G/NP0, Tolerance="+/- 0.25 pF", Voltage=100V, Assembled?=No
C49 C50 C55 C56: "1 µF ±10% 100V Ceramic Capacitor X7R 1206 (3216 Metric)", Capacitance="1 uF +/- 10%", Voltage=100V
C59 C61: library part CAP-0.33uF-0001, "0.33 µF ±10% 50V Ceramic Capacitor X7R 0603 (1608 Metric)", Capacitance="0.33 uF", Manufacturer="TDK Corporation", Temperature Coefficient=X7R, Tolerance="+/- 10%", Voltage=50V, Manufacturer Part Number=CGA3E3X7R1H334K080AB
C60 C62: library part CAP-10U-0001, "10 µF ±10% 50V Ceramic Capacitor X7R 1206 (3216 Metric)", Capacitance="10uF +/-20%", Manufacturer="Samsung Electro-Mechanics", Package Size=1206, Temperature Coefficient=X7R, Voltage Rating=50V, Assembled?=no, Manufacturer Part Number=CL31B106KBHNNNE
C63 C65: library part CAP-4.7U-0001, "4.7 µF ±10% 25V Ceramic Capacitor X5R 0603 (1608 Metric)", Capacitance="4.7uF +/-10%", Manufacturer="Taiyo Yuden", Package Size=0603, Temperature Coefficient=X5R, Voltage Rating=25V, Assembled?=no, Manufacturer Part Number=TMK107BBJ475KA-T
C69 C71: library part CAP-1U-0002, "1 µF ±10% 50V Ceramic Capacitor X7R 0603 (1608 Metric)", Capacitance="1 uF", Package Size=0603, Voltage=50V
C72: library part CAP-10N-0001, "10000 pF ±10% 100V Ceramic Capacitor X7R 0402 (1005 Metric)", Capacitance="10nF +/-10%", Manufacturer=YAGEO, Package Size=0402, Temperature Coefficient=X7R, Voltage Rating=100V, Assembled?=no, Manufacturer Part Number=CC0402KRX7R0BB103
D1: library part DIO-69.4V-0001, "69.4V Clamp 8.7A Ipp Tvs Diode Surface Mount DO-214AA (SMBJ)", Breakdown VOltage=47.8V, Package="DO-214AA (SMBJ)", Peak pulser current=8.7A, Reverse working maximum voltage=43V, Channels=Bidirectional, Vclamp=69.4V
D2 D3 D4 D5 D6 D7: library part LED_Amber_0001, "CAP CER 0.1UF 100V X7R 0603", Color=Amber, Current Rating=20mA, Manufacturer="Wurth Electronik", Package Size=0603, Assembled?=no, Manufacturer Part Number=150060AS75000, Vf=2V
D8 D9 D14 D15 D16 D17 D18 D19 D20 D21 D26 D27 D28 D29 D30 D31: library part DIO-0.53V-0001, "Diode Schottky 60 V 3A Surface Mount SOD-128/CFP5", Current Rating=3A, Manufacturer="Nexperia USA Inc.", Package=SOD-128/CFP5, Vf (Voltage Forward)="530 mV", Assembled=no, Manufacturer Part Number=PMEG6030EP,115
D10 D11 D12 D13 D22 D23 D24 D25: library part DIO-19.9V-0001, "19.9V Clamp 30.2A Ipp Tvs Diode Surface Mount DO-214AA (SMBJ)", Breakdown VOltage=13.3, Current Rating=30.2A, Manufacturer="Littlefuse Inc.", Package="DO-214AA (SMBJ)", Standoff Voltage=12V, Assembled=No, Manufacturer Part Number=SMBJ12CA
I1 I3: library part IC-MUX-0001
I2 I4: library part IC-MUX-0001, "Multiplexer 1 x 2:1 8-VSSOP", Vin=1.65-5.5V
I5 I6 I7 I8: library part IC-GDRV-0001, "Gate Drivers Automotive 3-A, 120-V half bridge gate driver with 5-V UVLO and enable 8-SOIC -40 to 125", Load Voltage-Max=120V, Manufacturer="Texas Instruments", Package=SOIC-8, Supply Current=3A, Assembled?=no, Manufacturer Part Number=UCC27284QDQ1, VCC-Max=16V, VCC-Min=5.5V
L1 L2: library part PWRIND-10U-0002, "10 µH Shielded Drum Core, Wirewound Inductor 10 A 16.8mOhm Max Nonstandard", Inductance="10 uH", Tolerance="+/- 20%", Assembled?=No, DCI="10 A", DCR="16.8 mOhm", Isat=16A
LM1 LM2: library part IC-BUCK-0006, "Buck Switching Regulator IC Positive Adjustable 1V 1 Output 5A 30-WFQFN Exposed Pad", Current=5A, Manufacturer="Texas Instruments", Package=30-WFQFN, Assembled?=no, Manufacturer Part Number=LM76005RNPR, Type=Buck
Q1: library part NMOS-60A-0001, "N-Channel 60 V 60A (Tc) 81W (Tc) Surface Mount 8-SOP Advance (5x5)", Drain Current=60A, Package=8-PowerVDFN, Vdss=60V, Vgs="2.5V @ 220uA", Vgs(Max)=20V
Q2 Q3: library part NMOS-200MA-0001, "MOSFET N-CH 60V 200MA SOT23", Manufacturer=Toshiba, Package=SOT-23-3, Assembled?=no, FET type=N-Channel, Id-Continuous=200mA, Manufacturer Part Number=T2N7002AK,LM, Rds On-Max=3.9Ohm, VDS-Max=60V, Vgs-Max=20V
Q4 Q5 Q6 Q7 Q8 Q9 Q10 Q11: library part NMOS-26A-0001, "MOSFET N-CH 60V 200MA SOT23", Manufacturer=Toshiba, Package="8-TSON Advance", Assembled?=no, FET type=N-Channel, Id-Continuous=26A, Manufacturer Part Number=TPN11006PL,LQ, Rds On-Max=18.1mOhm, VDS-Max=60V, Vgs-Max=20V
R1: library part RES-200K-0001, "200 kOhms ±1% 0.1W, 1/10W Chip Resistor 0603 (1608 Metric) Automotive AEC-Q200 Thick Film", Manufacturer="Panasonic Electronic Components", Package Size=0603, Power Rating="0.1 W", Resistance="200k +/- 1%", Assembled?=Yes, MFP=ERJ-3EKF2003V
R2 R4 R8 R11 R15: library part RES-100K-0003, "100 kOhms ±1% 0.1W, 1/10W Chip Resistor 0603 (1608 Metric) Moisture Resistant Thick Film", Package Size=0603, Power="1/10 W", Resistance="100 kOhm", Tolerance="+/- 1%", Assembled?=No
R3 R10: library part RES-2.15M-0001, "2.15 MOhms ±1% 0.1W, 1/10W Chip Resistor 0603 (1608 Metric) Moisture Resistant Thick Film", Package Size=0603, Power="1/10 W", Resistance="2.15 MOhm", Tolerance=+/-1%, Assembled?=No
R5 R12: library part RES-76.8K-0001, "76.8 kOhms ±1% 0.1W, 1/10W Chip Resistor 0603 (1608 Metric) Moisture Resistant Thick Film", Manufacturer=Yageo, Package Size=0603, Power="1/10 W", Resistance="76.8 kOhm", Tolerance="+/- 1%"
R6 R13: library part RES-100-0002, "100 Ohms ±1% 0.1W, 1/10W Chip Resistor 0603 (1608 Metric) Automotive AEC-Q200 Thick Film", Manufacturer=YAGEO, Package Size=0603, Power Rating=1/10W, Resistance="100Ohm +/-1%", Assembled?=no, Manufacturer Part Number=AC0603FR-10100RL
R7 R14: library part RES-10K-0002, "RES SMD 10K OHM 1% 1/10W 0603", Manufacturer=YAGEO, Package Size=0603, Power Rating=1/10W, Resistance="10kOhm +/-1%", Assembled?=no, Manufacturer Part Number=RC0603FR-0710KP
R9 R16: library part RES-9.09K-0001, "9.09 kOhms ±1% 0.1W, 1/10W Chip Resistor 0603 (1608 Metric) Moisture Resistant Thick Film", Package Size=0603, Power="1/10 W", Resistance="9.09 kOhm", Tolerance=+/-1%, Assembled?=No
R17 R18 R19 R20: library part RES-100-0001, "RES SMD 100 OHM 5% 1/16W 0402", Manufacturer=YAGEO, Package Size=0402, Power Rating=1/16W, Resistance="100Ohm +/-5%", Assembled?=no, Manufacturer Part Number=RC0402JR-07100RP
R21 R22 R31 R32: library part RES-1-0001, "1 Ohms ±1% 0.125W, 1/8W Chip Resistor 0603 (1608 Metric) Anti-Sulfur Thin Film", Power="1/8 W", Resistance="1 Ohms ±1%"
R23 R24 R25 R26 R27 R28 R29 R30 R33 R34 R35 R36 R37 R38 R39 R40: library part RES-33-0001, "RES SMD 33 OHM 5% 1/16W 0402", Manufacturer=YAGEO, Package Size=0402, Power Rating=1/16W, Resistance="33Ohm +/-5%", Assembled?=no, Manufacturer Part Number=RC0402JR-0733RP
R41: library part RES-4.7K-0001, "RES SMD 4.7K OHM 1% 1/16W 0402", Manufacturer=YAGEO, Package Size=0402, Power Rating=1/16W, Resistance="4.7kOhm +/-1%", Assembled?=no, Manufacturer Part Number=RC0402FR-074K7P
R42: library part RES-120-0002, "120 Ohms ±1% 0.5W, 1/2W Chip Resistor 1206 (3216 Metric) Thick Film", Package Size=1206, Power="0.5 W", Resistance="120 Ohm", Tolerance=1%
R43 R44: library part RES-4.7K-0002, "RES SMD 4.7K OHM 1% 1/10W 0603", Manufacturer=YAGEO, Package Size=0603, Power Rating=1/10W, Resistance="4.7kOhm +/-1%", Assembled?=no, Manufacturer Part Number=AF0603FR-074K7L
TP1 TP2 TP3 TP4 TP5 TP6 TP7 TP8 TP9 TP10: library part TEST-POINT-0001, "Oranange PC Test Point, Miniature Phoisphor Bronze Silver Plating Through Hole Mounting Type"
U1: library part IC-CAN-TRANSCEIVER-0002, "1/1 Transceiver CANbus 8-VSON (3x3)", Manufacturer="Texas Instrument", CAN Capability=FD-CAN, Manufacturer Part Number=TCAN1042HGDRBTQ1
U2: library part IC-LDO-3.3V-0002, "Linear Voltage Regulator IC Positive Fixed 1 Output 500mA SOT-223-4", Current="500 mA", Package=SOT-223-4, Vin=25V, Vout=3.3V
U3: library part IC-LDO-5V-0003, "Linear Voltage Regulator IC Positive Fixed 1 Output 500mA SOT-223-4", Current="500 mA", Manufacturer="Texas Instruments", Package Size=SOT223-4, Assembled?=no, Manufacturer Part Number=UA78M05IDCYR, Type="Low dropout (LDO)"
U4: library part IC-STM32G431CBU6, "128KB 1.71V~3.6V ARM-MSeries 32KB 170MHz FLASH 42 UFQFPN-48(7x7) Microcontroller Units (MCUs/MPUs/SOCs) ROHS", Package=UFQFPN-48, Assembled?=no, Manufacturer Part Number=STM32G431CBU6
X1 X2 X10 X11: library part "Micro-Fit Molex 4 Pin 2 Row Vertical", Package=43045-0412, DeviceName=43045-0412, DeviceSetName=HEADER_POS4_?, GateName_1=G$1, LibraryName=con-molex-micro-fit-3_0_2, SymbolName_1=HEADER_POS4
X3: library part "Micro-Fit Molex 2 Pin Vertical", Package=43650-0215, DeviceName=43650-0215, DeviceSetName=HEADER_POS2_?, GateName_1=G$1, LibraryName=con-molex-micro-fit-3_0_2, SymbolName_1=HEADER_POS2
X4 X5: library part "Micro-Fit Molex 6 Pin 2 Row Vertical", Package=43045-0612, DeviceName=43045-0612, DeviceSetName=HEADER_POS6_?, GateName_1=G$1, LibraryName=con-molex-micro-fit-3_0_2, SymbolName_1=HEADER_POS6
X6 X7: library part "Micro-Fit Molex 8 Pin 2 Row Vertical", Package=43045-0812, DeviceName=43045-0812, DeviceSetName=HEADER_POS8_?, GateName_1=G$1, LibraryName=con-molex-micro-fit-3_0_2, SymbolName_1=HEADER_POS8
X8 X9: library part HEADER_POS2_?43045-0212, Package=43045-0212, DeviceName=43045-0212, DeviceSetName=HEADER_POS2_?, GateName_1=G$1, LibraryName=con-molex-micro-fit-3_0_2, SymbolName_1=HEADER_POS2

## Via types
v1: diameter 11.81, hole 7.87, Top Layer to Bottom Layer, 24 vias

## Nets (pads, with @x,y where several pads share a name; then routed paths per layer and width w, separated by ;. In a path a pad name is that pad's centre, name@x,y a point inside that pad or via, vN(x,y) a via of type N, cw(c..) or ccw(c..) an arc to the next point about the centre after c; other vN are vias at no path point)
5V: C60.1 C63.1 C64.1 TP9.1 U1.3 U3.3 X1.P$4 X2.P$4
12V_MOTOR_BOOT_0: C11.2 LM1.6
12V_MOTOR_BOOT_1: C32.2 LM2.6
12V_MOTOR_EN_0: LM1.18 R3.1 R4.1
12V_MOTOR_EN_1: LM2.18 R10.1 R11.1
12V_MOTOR_FB_0: C21.2 LM1.12 R8.2 R9.1
12V_MOTOR_FB_1: C42.2 LM2.12 R15.2 R16.1
12V_MOTOR_MAIN_0: C12.1 C13.1 C14.1 C15.1 C16.1 C17.1 C18.1 C19.1 C20.1 C21.1 C47.1 C48.1 C49.1 C50.1 C59.1 C61.1 D8.2 D9.2 L1.2 Q4.3 Q5.3 R8.1 R21.2 R22.2 TP4.1 U2.1 U3.1
12V_MOTOR_MAIN_1: C33.1 C34.1 C35.1 C36.1 C37.1 C38.1 C39.1 C40.1 C41.1 C42.1 C53.1 C54.1 C55.1 C56.1 D20.2 D21.2 L2.2 Q8.3 Q9.3 R15.1 R31.2 R32.2 TP8.1
12V_MOTOR_PG_0: LM1.16 Q2.1 R7.1
12V_MOTOR_PG_1: LM2.16 Q3.1 R14.1
12V_MOTOR_SW_0: C11.1 L1.1 LM1.1 LM1.2 LM1.3 LM1.4 LM1.5 TP3.1
12V_MOTOR_SW_1: C32.1 L2.1 LM2.1 LM2.2 LM2.3 LM2.4 LM2.5 TP7.1
12V_MOTOR_VCC_0: C10.1 LM1.8 R6.1 R7.2
12V_MOTOR_VCC_1: C31.1 LM2.8 R13.1 R14.2
CAN_N: R42.1 U1.6 X10.P$3 X11.P$3
CAN_P: R42.2 U1.7 X10.P$1 X11.P$1
CAN_STB: R41.2 U1.8 U4.38
DEBUG_LED_0: U4.9
DEBUG_LED_1: U4.10
DEBUG_LED_2: U4.11
DIR_1_In_0: I2.5 I5.5 I6.6 R18.1
DIR_1_In_1: I4.5 I7.5 I8.6 R20.1
DIR_2_In_0: I1.5 I5.6 I6.5 R17.1
DIR_2_In_1: I3.5 I7.6 I8.5 R19.1
FDCAN_RX: U1.4 U4.33
FDCAN_TX: U1.1 U4.34
GND: C1.2 C2.2 C3.2 C4.2 C5.2 C6.2 C7.2 C8.2 C10.2 C12.2 C13.2 C14.2 C15.2 C16.2 C17.2 C18.2 C19.2 C20.2 C22.2 C23.2 C24.2 C25.2 C26.2 C27.2 C28.2 C29.2 C31.2 C33.2 C34.2 C35.2 C36.2 C37.2 C38.2 C39.2 C40.2 C41.2 C43.2 C44.1 C45.2 C46.1 C47.2 C48.2 C49.2 C50.2 C53.2 C54.2 C55.2 C56.2 C59.2 C60.2 C61.2 C62.2 C63.2 C64.2 C65.2 C66.2 C67.2 C68.2 C69.2 C70.2 C71.2 C72.2 D1.2 D4.2 D5.2 D6.2 D7.2 D10.1 D11.1 D14.1 D17.1 D22.1 D23.1 D26.1 D29.1 I1.2 I1.4 I2.1 I2.4 I3.2 I3.4 I4.1 I4.4 I5.7 I6.7 I7.7 I8.7 LM1.13 LM1.14 LM1.15 LM1.17 LM1.19 LM1.24 LM1.25 LM1.26 LM1.27 LM1.28 LM1.29 LM1.30 LM1.31 LM2.13 LM2.14 LM2.15 LM2.17 LM2.19 LM2.24 LM2.25 LM2.26 LM2.27 LM2.28 LM2.29 LM2.30 LM2.31 Q1.3 Q2.2 Q3.2 Q6.2 Q7.2 Q10.2 Q11.2 R2.1 R4.2 R9.2 R11.2 R16.2 R41.1 TP2.1 TP6.1 U1.2 U1.9 U2.2 U3.2 U4.49 X1.P$2 X2.P$2 X4.P$3 X4.P$4 X4.P$6 X5.P$3 X5.P$4 X5.P$6 X6.P$1 X6.P$2 X6.P$3 X6.P$4 X7.P$1 X7.P$2 X7.P$3 X7.P$4 X10.P$2 X10.P$4 X11.P$2 X11.P$4
  other v1: 12825,3532.6 12846.65,3570 12803.35,3571.97 12825,3607.4 11960,4352.68 11934.41,4375.12 11985.59,4375.12 11960,4397.56 11934.41,4420 11985.59,4420 11960,4442.44 11934.41,4464.88 11985.59,4464.88 11960,4487.32 12200,5262.68 12174.41,5285.12 12225.59,5285.12 12200,5307.56 12174.41,5330 12225.59,5330 12200,5352.44 12174.41,5374.88 12225.59,5374.88 12200,5397.32
HO_1G_0: D13.2 D19.2 I5.3 R29.2
HO_1G_1: D25.2 D31.2 I7.3 R39.2
HO_1M_0: Q5.1 R30.2
HO_1M_1: Q9.1 R40.2
HO_2G_0: D12.2 D18.2 I6.3 R27.2
HO_2G_1: D24.2 D30.2 I8.3 R37.2
HO_2M_0: Q4.1 R28.2
HO_2M_1: Q8.1 R38.2
I2C1_SCL: R44.1 U4.46 X5.P$5
I2C1_SDA: R43.1 U4.47 X4.P$2 X5.P$2
LIMIT_0_A: U4.2 X7.P$5
LIMIT_0_B: U4.3 X7.P$6
LIMIT_0_C: U4.4 X7.P$7
LIMIT_0_D: U4.5 X7.P$8
LIMIT_1_A: U4.16 X6.P$5
LIMIT_1_B: U4.17 X6.P$6
LIMIT_1_C: U4.18 X6.P$7
LIMIT_1_D: U4.19 X6.P$8
LO_1_0: D10.2 D15.2 I5.8 R25.2
LO_1_1: D22.2 D27.2 I7.8 R35.2
LO_2_0: D11.2 D16.2 I6.8 R26.2
LO_2_1: D23.2 D28.2 I8.8 R36.2
M0+: C51.2 D8.1 D13.1 D14.2 I5.4 Q5.2 Q7.3 X9.P$1
M0-: C52.2 D9.1 D12.1 D17.2 I6.4 Q4.2 Q6.3 X9.P$2
M1+: C57.2 D20.1 D25.1 D26.2 I7.4 Q9.2 Q11.3 X8.P$1
M1-: C58.2 D21.1 D24.1 D29.2 I8.4 Q8.2 Q10.3 X8.P$2
MOTOR_0_DIR: I1.6 I2.6 U4.26
MOTOR_0_PWM: I1.1 I2.2 U4.25
MOTOR_1_DIR: I3.6 I4.6 U4.28
MOTOR_1_PWM: I3.1 I4.2 U4.27
NetC9_1: C9.1 LM1.11
NetC9_2: C9.2 C30.2 LM1.9 LM2.9 R5.2 R12.2
NetC30_1: C30.1 LM2.11
NetC51_1: C51.1 I5.2
NetC52_1: C52.1 I6.2
NetC57_1: C57.1 I7.2
NetC58_1: C58.1 I8.2
NetD2_1: D2.1 R6.2
NetD2_2: D2.2 Q2.3
NetD3_1: D3.1 R13.2
NetD3_2: D3.2 Q3.3
NetD4_1: D4.1 R17.2
NetD5_1: D5.1 R18.2
NetD6_1: D6.1 R19.2
NetD7_1: D7.1 R20.2
NetD15_1: D15.1 R23.1 R25.1
NetD16_1: D16.1 R24.2 R26.1
NetD18_1: D18.1 R27.1 R28.1
NetD19_1: D19.1 R29.1 R30.1
NetD27_1: D27.1 R33.1 R35.1
NetD28_1: D28.1 R34.2 R36.1
NetD30_1: D30.1 R37.1 R38.1
NetD31_1: D31.1 R39.1 R40.1
NetI5_1: I5.1 R22.1
NetI6_1: I6.1 R21.1
NetI7_1: I7.1 R32.1
NetI8_1: I8.1 R31.1
NetLM1_10: LM1.10 R5.1
NetLM2_10: LM2.10 R12.1
NetQ1_1: Q1.1 R1.2 R2.2
NetQ1_2: Q1.2 X3.P$1
NetQ6_1: Q6.1 R24.1
NetQ7_1: Q7.1 R23.2
NetQ10_1: Q10.1 R34.1
NetQ11_1: Q11.1 R33.2
QUAD_0_A: U4.44
QUAD_0_B: U4.45
QUAD_1_A: U4.14 X2.P$1
QUAD_1_B: U4.12 X2.P$3
SWCLK: U4.37
SWDIO: U4.36
VBAT: C1.1 C2.1 C3.1 C4.1 C5.1 C6.1 C7.1 C8.1 C22.1 C23.1 C24.1 C25.1 C26.1 C27.1 C28.1 C29.1 D1.1 LM1.20 LM1.21 LM1.22 LM2.20 LM2.21 LM2.22 R1.1 R3.2 R10.2 TP1.1 TP5.1 X3.P$2
VBAT_MCU: C43.1 C44.2 C45.1 C46.2 C62.1 C65.1 C66.1 C67.1 C68.1 C69.1 C70.1 C71.1 C72.1 I1.8 I2.8 I3.8 I4.8 R43.2 R44.2 TP10.1 U2.3 U4.1 U4.20 U4.21 U4.23 U4.35 U4.48 X4.P$1 X5.P$1
pads on no net: I1.3 I1.7 I2.3 I2.7 I3.3 I3.7 I4.3 I4.7 LM1.7 LM1.23 LM2.7 LM2.23 U1.5 U4.6 U4.7 U4.8 U4.13 U4.15 U4.22 U4.24 U4.29 U4.30 U4.31 U4.32 U4.39 U4.40 U4.41 U4.42 U4.43 X1.1 X1.P$1 X1.P$3 X2.1 X3.1 X4.1 X4.P$5 X5.1 X6.1 X7.1 X8.1 X9.1 X10.1 X11.1